# Altium PCB Intelligent_Agriculture.PcbDoc (part 5 of 5)
Units mm, origin at the board's own origin, x right, y up, seen from the top; angles counter-clockwise.
Board outline 99.69 x 99.69 mm, 2 copper layers (Top Layer, Bottom Layer); 90 components, 60 nets, 339 pads, 86 vias.
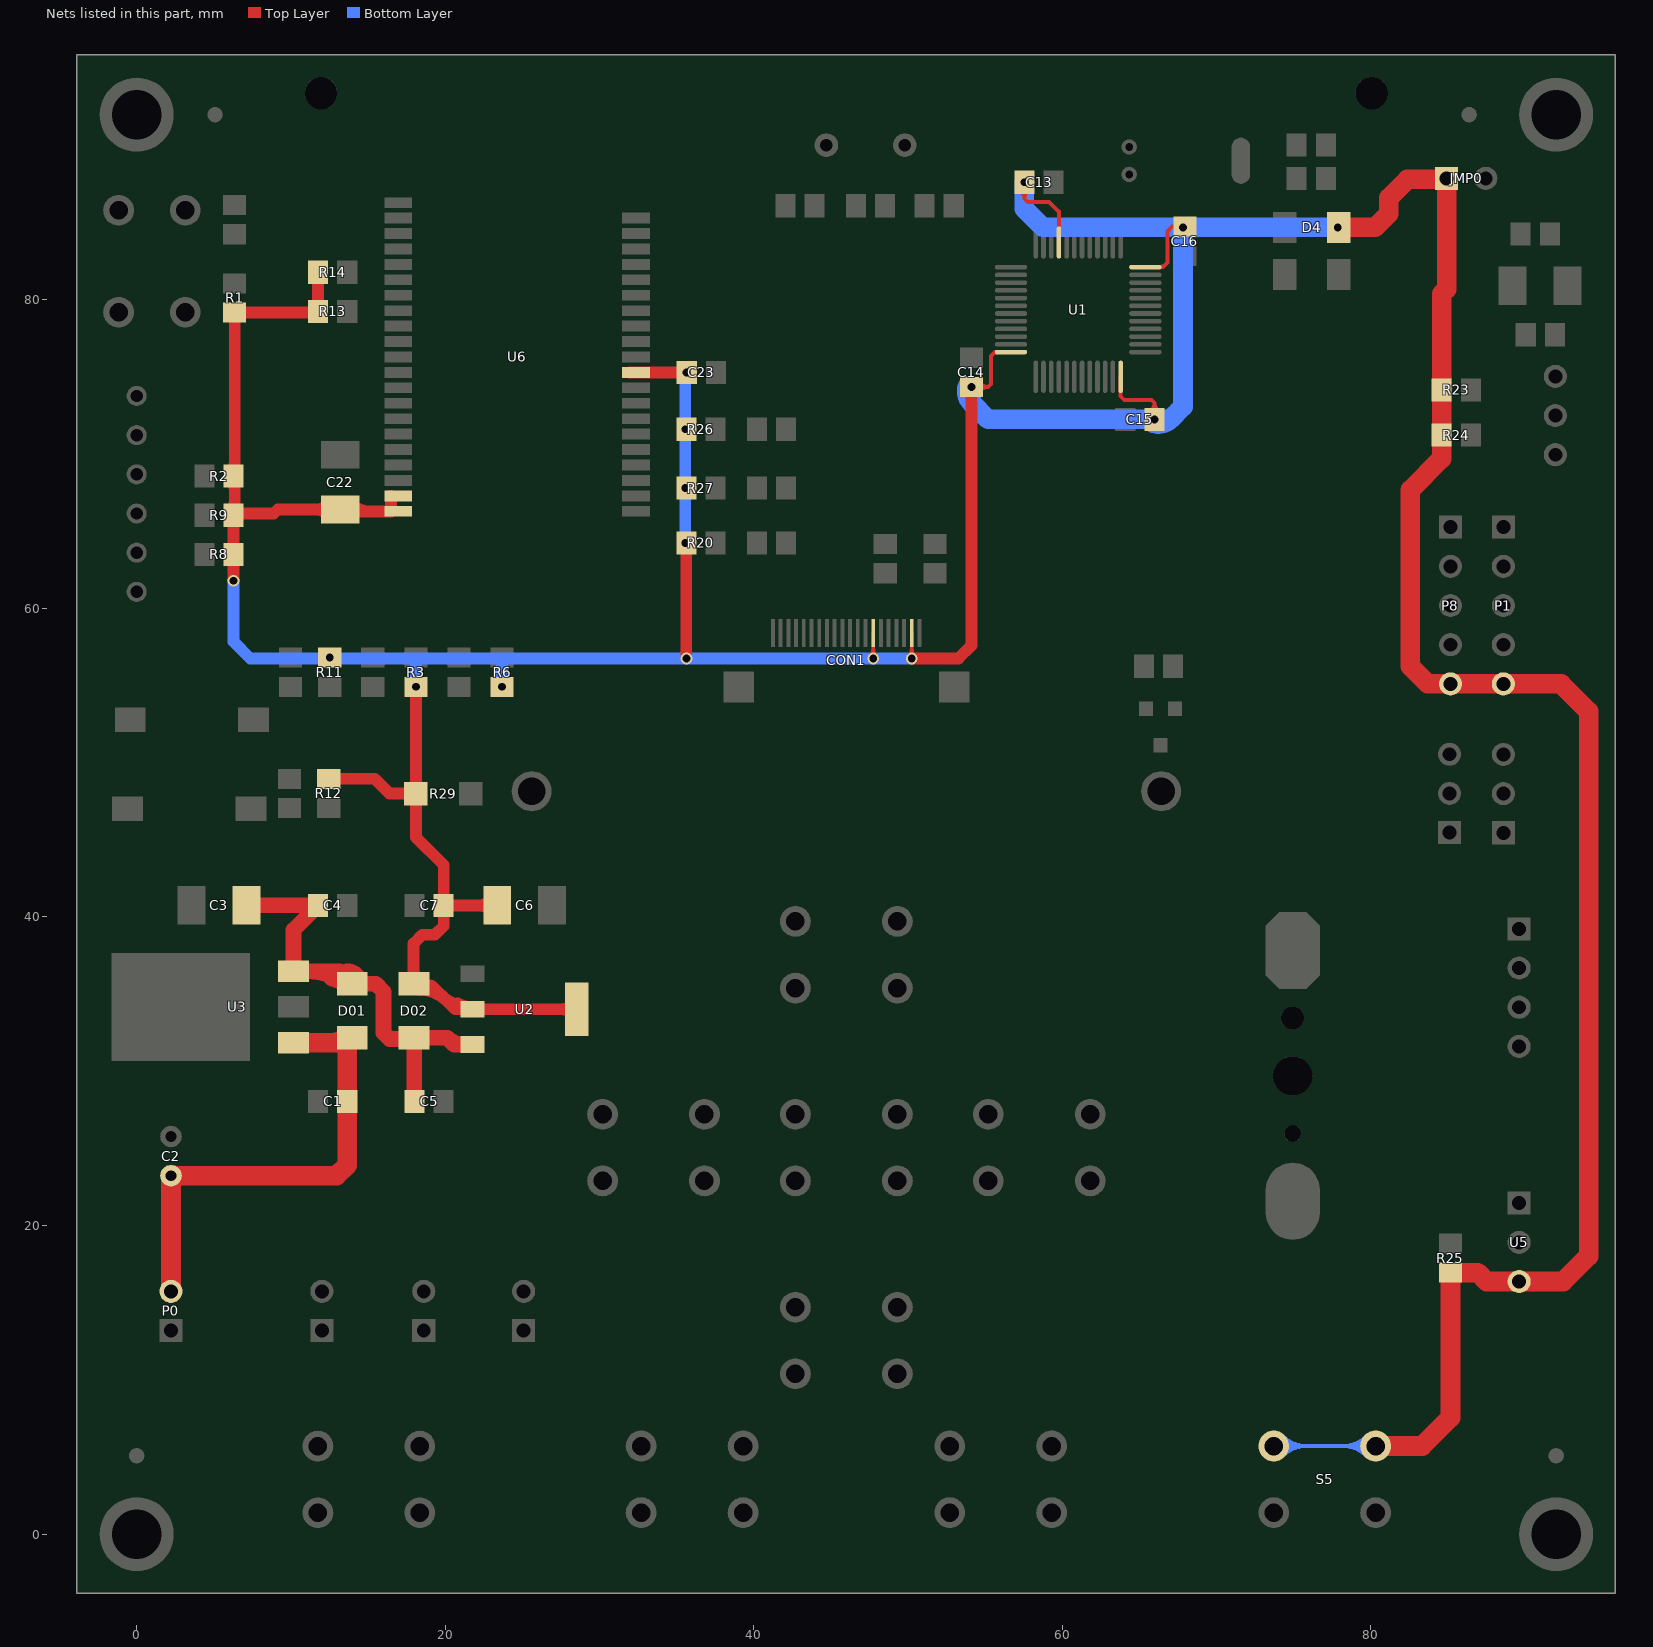
[diagram p5: the nets of this part, all layers, seen from the top]

## Via types
v1: diameter 0.762, hole 0.508, Top Layer to Bottom Layer, tented both sides, 82 vias
v2: diameter 4.8, hole 3.2, Top Layer to Bottom Layer, tented both sides, 4 vias

## Nets (pads, with @x,y where several pads share a name; then routed paths per layer and width w, separated by ;. In a path a pad name is that pad's centre, name@x,y a point inside that pad or via, vN(x,y) a via of type N, cw(c..) or ccw(c..) an arc to the next point about the centre after c; other vN are vias at no path point) (continued)
VCC3V3: C6.1 C7.1 C13.1 C14.1 C15.1 C16.1 C22.1 C23.2 CON1.14 CON1.19 D02.1 D4.1 JMP0.1 P1.5 P8.5 R1.2 R2.2 R3.2 R6.2 R8.2 R9.2 R11.1 R12.2 R13.1 R14.1 R20.2 R23.1 R24.1 R25.2 R26.2 R27.2 R29.2 S5.1 S5.4 U1.9 U1.24 U1.36 U1.48 U2.2 U2.4 U5.3 U6.10 U6.39 U6.40 | length 554.8
  Top Layer w0.254: v1(47.738,56.752) CON1.14@47.738,58.397 ; v1(50.238,56.755) CON1.19@50.238,58.397 ; 54.102,70.214 54.229,70.341 54.229,74.344 55.184,74.344 ; U1.24@56.67,76.613 55.626,76.613 55.372,76.359 55.372,74.532 55.184,74.344 ; C13.1@57.585,87.618 v1(57.534,87.618) 57.534,86.536 ; U1.9@59.774,83.717 59.774,85.713 59.754,85.713 59.119,86.348 57.722,86.348 57.534,86.536 ; U1.36@63.774,75.009 63.774,73.75 64.008,73.516 65.786,73.516 65.974,73.328 ; U1.48@65.378,82.113 66.509,82.113 66.802,82.406 66.802,84.438 67.117,84.753 ; C15.1@65.974,72.246 65.974,73.328 ; C16.1@67.945,84.753 67.117,84.753 ; JMP0.1@84.834,87.806 JMP0.1@84.9,87.872 ; 93.726,22.589 93.726,41.893 ; v1@47.559,56.932 ccw(c47.125,57.365) 47.738,57.365 ; v1@47.559,56.932 ccw(c47.125,57.365) 47.738,57.365 ; v1@47.559,56.932 ccw(c47.125,57.365) 47.738,57.365 ; 47.738,57.365 ccw(c48.352,57.365) v1@47.918,56.932 ; 47.738,57.365 ccw(c48.352,57.365) v1@47.918,56.932 ; 47.738,57.365 ccw(c48.352,57.365) v1@47.918,56.932 ; v1@50.059,56.934 ccw(c49.625,57.368) 50.238,57.368 ; v1@50.059,56.934 ccw(c49.625,57.368) 50.238,57.368 ; v1@50.059,56.934 ccw(c49.625,57.368) 50.238,57.368 ; 50.238,57.368 ccw(c50.852,57.368) v1@50.418,56.934 ; 50.238,57.368 ccw(c50.852,57.368) v1@50.418,56.934 ; 50.238,57.368 ccw(c50.852,57.368) v1@50.418,56.934 ; C14.1@53.832,73.974 cw(c52.874,73.016) 54.229,73.016 ; C14.1@53.832,73.974 cw(c52.874,73.016) 54.229,73.016 ; C14.1@53.832,73.974 cw(c52.874,73.016) 54.229,73.016 ; C14.1@53.922,74.164 cw(c53.182,73.424) 54.229,73.424 ; C14.1@53.922,74.164 cw(c53.182,73.424) 54.229,73.424 ; C14.1@53.922,74.164 cw(c53.182,73.424) 54.229,73.424 ; C14.1@54.012,74.154 cw(c53.487,73.629) 54.229,73.629 ; C14.1@54.012,74.154 cw(c53.487,73.629) 54.229,73.629 ; C14.1@54.012,74.154 cw(c53.487,73.629) 54.229,73.629 ; 54.229,73.147 cw(c55.399,73.147) C14.1@54.572,73.974 ; 54.229,73.147 cw(c55.399,73.147) C14.1@54.572,73.974 ; 54.229,73.147 cw(c55.399,73.147) C14.1@54.572,73.974 ; C14.1@54.282,74.164 cw(c54.715,73.731) C14.1@54.715,74.344 ; C14.1@54.282,74.164 cw(c54.715,73.731) C14.1@54.715,74.344 ; C14.1@54.282,74.164 cw(c54.715,73.731) C14.1@54.715,74.344 ; C14.1@54.282,74.524 ccw(c54.715,74.957) C14.1@54.715,74.344 ; C14.1@54.282,74.524 ccw(c54.715,74.957) C14.1@54.715,74.344 ; C14.1@54.282,74.524 ccw(c54.715,74.957) C14.1@54.715,74.344 ; C14.1@54.636,74.052 cw(c55.184,73.684) 55.184,74.344 ; C14.1@54.636,74.052 cw(c55.184,73.684) 55.184,74.344 ; C14.1@54.636,74.052 cw(c55.184,73.684) 55.184,74.344 ; C14.1@54.636,74.636 ccw(c55.184,75.004) 55.184,74.344 ; C14.1@54.636,74.636 ccw(c55.184,75.004) 55.184,74.344 ; C14.1@54.636,74.636 ccw(c55.184,75.004) 55.184,74.344 ; 55.485,76.472 cw(c55.77,76.187) U1.24@55.77,76.59 ; 55.485,76.472 cw(c55.77,76.187) U1.24@55.77,76.59 ; 55.485,76.472 cw(c55.77,76.187) U1.24@55.77,76.59 ; C13.1@57.242,87.084 cw(c56.874,86.536) 57.534,86.536 ; C13.1@57.242,87.084 cw(c56.874,86.536) 57.534,86.536 ; C13.1@57.242,87.084 cw(c56.874,86.536) 57.534,86.536 ; C13.1@57.354,87.438 cw(c56.921,87.005) C13.1@57.534,87.005 ; C13.1@57.354,87.438 cw(c56.921,87.005) C13.1@57.534,87.005 ; C13.1@57.354,87.438 cw(c56.921,87.005) C13.1@57.534,87.005 ; 57.534,86.536 cw(c58.194,86.536) C13.1@57.826,87.084 ; 57.534,86.536 cw(c58.194,86.536) C13.1@57.826,87.084 ; 57.534,86.536 cw(c58.194,86.536) C13.1@57.826,87.084 ; C13.1@57.534,87.005 cw(c58.147,87.005) C13.1@57.714,87.438 ; C13.1@57.534,87.005 cw(c58.147,87.005) C13.1@57.714,87.438 ; C13.1@57.534,87.005 cw(c58.147,87.005) C13.1@57.714,87.438 ; C15.1@65.682,72.78 ccw(c65.314,73.328) 65.974,73.328 ; C15.1@65.682,72.78 ccw(c65.314,73.328) 65.974,73.328 ; C15.1@65.682,72.78 ccw(c65.314,73.328) 65.974,73.328 ; C15.1@65.797,72.431 ccw(c65.371,72.857) C15.1@65.974,72.857 ; C15.1@65.797,72.431 ccw(c65.371,72.857) C15.1@65.974,72.857 ; C15.1@65.797,72.431 ccw(c65.371,72.857) C15.1@65.974,72.857 ; C15.1@65.974,72.871 ccw(c66.597,72.871) C15.1@66.157,72.431 ; C15.1@65.974,72.871 ccw(c66.597,72.871) C15.1@66.157,72.431 ; C15.1@65.974,72.871 ccw(c66.597,72.871) C15.1@66.157,72.431 ; 65.974,73.328 ccw(c66.634,73.328) C15.1@66.266,72.78 ; 65.974,73.328 ccw(c66.634,73.328) C15.1@66.266,72.78 ; 65.974,73.328 ccw(c66.634,73.328) C15.1@66.266,72.78 ; U1.48@66.278,82.136 ccw(c66.278,82.749) 66.712,82.316 ; U1.48@66.278,82.136 ccw(c66.278,82.749) 66.712,82.316 ; U1.48@66.278,82.136 ccw(c66.278,82.749) 66.712,82.316 ; 67.117,84.753 ccw(c67.117,84.998) C16.1@67.349,84.92 ; 67.117,84.753 cw(c67.117,84.508) C16.1@67.349,84.586 ; 67.117,84.753 cw(c67.117,84.07) C16.1@67.628,84.523 ; 67.117,84.753 ccw(c67.117,84.998) C16.1@67.349,84.92 ; 67.117,84.753 cw(c67.117,84.508) C16.1@67.349,84.586 ; 67.117,84.753 cw(c67.117,84.07) C16.1@67.628,84.523 ; 67.117,84.753 ccw(c67.117,84.998) C16.1@67.349,84.92 ; 67.117,84.753 cw(c67.117,84.508) C16.1@67.349,84.586 ; 67.117,84.753 cw(c67.117,84.07) C16.1@67.628,84.523 ; C16.1@67.352,84.753 ccw(c67.352,85.158) C16.1@67.638,84.872 ; C16.1@67.352,84.753 ccw(c67.352,85.158) C16.1@67.638,84.872 ; C16.1@67.352,84.753 ccw(c67.352,85.158) C16.1@67.638,84.872
  Top Layer w0.762: v1(6.284,61.788) R9.2@6.284,66.15 ; 11.047,79.17 cw(c11.047,78.445) R13.1@11.56,78.958 ; R13.1@11.672,79.17 R1.2@6.35,79.17 6.35,66.15 8.89,66.15 9.144,66.404 12.954,66.404 13.076,66.282 U6.40@16.477,66.282 ; R13.1@11.75,79.248 R14.1@11.75,81.788 ; R12.2@12.446,48.956 15.428,48.956 16.39,47.994 R29.2@18.098,47.994 ; U6.40@16.477,66.277 U6.40@16.477,66.282 ; U6.39@16.477,67.277 U6.40@16.477,66.282 ; v1(18.098,54.918) R29.2@18.098,47.994 ; D02.1@18.347,35.319 cw(c18.643,34.401) 19.324,35.083 ; C6.1@23.368,40.75 C7.1@19.898,40.75 ; U2.4@28.521,34.019 U2.2@21.771,34.019 20.65,34.019 19.126,35.543 ; U6.10@31.941,75.282 32.322,75.282 34.532,75.282 34.544,75.294 v1(35.626,75.294) ; v1@35.626,56.777 R20.2@35.626,64.245 R20.2@35.626,64.397 ; v1(50.238,56.755) 53.267,56.755 54.102,57.59 54.102,70.214 v1(54.102,74.344) ; R9.2@6.094,66.33 ccw(c5.475,66.949) 6.35,66.949 ; R9.2@6.094,66.33 ccw(c5.475,66.949) 6.35,66.949 ; R9.2@6.094,66.33 ccw(c5.475,66.949) 6.35,66.949 ; R2.2@6.094,68.29 cw(c5.475,67.671) 6.35,67.671 ; R2.2@6.094,68.29 cw(c5.475,67.671) 6.35,67.671 ; R2.2@6.094,68.29 cw(c5.475,67.671) 6.35,67.671 ; R2.2@6.094,68.87 ccw(c5.475,69.489) 6.35,69.489 ; R2.2@6.094,68.87 ccw(c5.475,69.489) 6.35,69.489 ; R2.2@6.094,68.87 ccw(c5.475,69.489) 6.35,69.489 ; R9.2@6.474,65.95 cw(c6.958,65.466) 6.958,66.15 ; R9.2@6.474,65.95 cw(c6.958,65.466) 6.958,66.15 ; R9.2@6.474,65.95 cw(c6.958,65.466) 6.958,66.15 ; 11.605,66.404 ccw(c11.605,67.657) C22.1@12.491,66.771 ; 11.605,66.404 cw(c11.605,65.151) C22.1@12.491,66.037 ; 11.605,66.404 ccw(c11.605,67.657) C22.1@12.491,66.771 ; 11.605,66.404 cw(c11.605,65.151) C22.1@12.491,66.037 ; 11.605,66.404 ccw(c11.605,67.657) C22.1@12.491,66.771 ; 11.605,66.404 cw(c11.605,65.151) C22.1@12.491,66.037 ; C22.1@13.925,66.037 cw(c14.516,65.446) 14.516,66.282 ; C22.1@13.925,66.037 cw(c14.516,65.446) 14.516,66.282 ; C22.1@13.925,66.037 cw(c14.516,65.446) 14.516,66.282 ; C22.1@13.925,66.771 ccw(c15.106,67.952) 15.106,66.282 ; C22.1@13.925,66.771 ccw(c15.106,67.952) 15.106,66.282 ; C22.1@13.925,66.771 ccw(c15.106,67.952) 15.106,66.282 ; 17.178,47.994 ccw(c17.178,48.914) R29.2@17.829,48.263 ; 17.178,47.994 cw(c17.178,47.074) R29.2@17.829,47.725 ; 17.178,47.994 ccw(c17.178,48.914) R29.2@17.829,48.263 ; 17.178,47.994 cw(c17.178,47.074) R29.2@17.829,47.725 ; 17.178,47.994 ccw(c17.178,48.914) R29.2@17.829,48.263 ; 17.178,47.994 cw(c17.178,47.074) R29.2@17.829,47.725 ; D02.1@17.722,35.931 ccw(c17.174,36.479) 17.949,36.479 ; D02.1@17.722,35.931 ccw(c17.174,36.479) 17.949,36.479 ; D02.1@17.722,35.931 ccw(c17.174,36.479) 17.949,36.479 ; R29.2@17.829,47.725 cw(c17.178,47.074) 18.098,47.074 ; R29.2@17.829,47.725 cw(c17.178,47.074) 18.098,47.074 ; R29.2@17.829,47.725 cw(c17.178,47.074) 18.098,47.074 ; R29.2@17.829,48.263 ccw(c17.178,48.914) 18.098,48.914 ; R29.2@17.829,48.263 ccw(c17.178,48.914) 18.098,48.914 ; R29.2@17.829,48.263 ccw(c17.178,48.914) 18.098,48.914 ; 17.949,36.643 ccw(c18.956,36.643) D02.1@18.244,35.931 ; 17.949,36.643 ccw(c18.956,36.643) D02.1@18.244,35.931 ; 17.949,36.643 ccw(c18.956,36.643) D02.1@18.244,35.931 ; 18.098,47.074 cw(c19.018,47.074) R29.2@18.367,47.725 ; 18.098,47.074 cw(c19.018,47.074) R29.2@18.367,47.725 ; 18.098,47.074 cw(c19.018,47.074) R29.2@18.367,47.725 ; R29.2@18.098,47.994 18.098,45.167 19.898,43.367 C7.1@19.898,40.75 ; 18.098,48.914 ccw(c19.018,48.914) R29.2@18.367,48.263 ; 18.098,48.914 ccw(c19.018,48.914) R29.2@18.367,48.263 ; 18.098,48.914 ccw(c19.018,48.914) R29.2@18.367,48.263 ; D02.1@18.233,35.301 cw(c18.233,32.561) 20.171,34.498 ; D02.1@18.233,35.301 cw(c18.233,32.561) 20.171,34.498 ; D02.1@18.233,35.301 cw(c18.233,32.561) 20.171,34.498 ; D02.1@18.546,35.865 ccw(c19.126,36.226) 19.126,35.543 ; D02.1@18.546,35.865 ccw(c19.126,36.226) 19.126,35.543 ; D02.1@18.546,35.865 ccw(c19.126,36.226) 19.126,35.543 ; D02.1@18.553,35.855 ccw(c20.378,36.908) 19.833,34.872 ; D02.1@18.553,35.855 ccw(c20.378,36.908) 19.833,34.872 ; D02.1@18.553,35.855 ccw(c20.378,36.908) 19.833,34.872 ; 19.126,35.543 17.949,35.543 17.949,38.28 18.517,38.848 19.331,38.848 19.898,39.414 C7.1@19.898,40.75 ; 19.728,34.941 ccw(c21.546,36.759) U2.2@21.546,34.188 ; 19.728,34.941 ccw(c21.546,36.759) U2.2@21.546,34.188 ; 19.728,34.941 ccw(c21.546,36.759) U2.2@21.546,34.188 ; 20.813,34.384 cw(c20.564,33.452) U2.2@21.4,33.935 ; 20.813,34.384 cw(c20.564,33.452) U2.2@21.4,33.935 ; 20.813,34.384 cw(c20.564,33.452) U2.2@21.4,33.935 ; 22.115,40.75 ccw(c22.115,42.003) C6.1@23.001,41.117 ; 22.115,40.75 cw(c22.115,39.497) C6.1@23.001,40.383 ; 22.115,40.75 ccw(c22.115,42.003) C6.1@23.001,41.117 ; 22.115,40.75 cw(c22.115,39.497) C6.1@23.001,40.383 ; 22.115,40.75 ccw(c22.115,42.003) C6.1@23.001,41.117 ; 22.115,40.75 cw(c22.115,39.497) C6.1@23.001,40.383 ; 27.57,34.019 ccw(c27.57,34.97) U2.4@28.242,34.298 ; 27.57,34.019 cw(c27.57,33.068) U2.4@28.242,33.74 ; 27.57,34.019 ccw(c27.57,34.97) U2.4@28.242,34.298 ; 27.57,34.019 cw(c27.57,33.068) U2.4@28.242,33.74 ; 27.57,34.019 ccw(c27.57,34.97) U2.4@28.242,34.298 ; 27.57,34.019 cw(c27.57,33.068) U2.4@28.242,33.74
  Top Layer w1.27: D4.1@77.915,84.697 80.269,84.697 81.153,85.581 81.153,86.597 82.362,87.806 JMP0.1@84.834,87.806 ; S5.1@80.302,5.71 83.312,5.71 85.154,7.552 R25.2@85.154,16.945 86.924,16.945 87.498,16.371 U5.3@89.599,16.371 92.461,16.371 94.107,18.017 94.107,53.323 92.324,55.106 P1.5@88.583,55.106 83.688,55.106 82.55,56.244 82.55,67.674 84.585,69.709 R24.1@84.585,71.235 R23.1@84.585,74.156 84.585,80.377 84.9,80.692 JMP0.1@84.9,87.872
  Bottom Layer w0.254: S5.4@73.698,5.71 S5.1@80.302,5.71 ; S5.4@74.136,5.272 cw(c75.192,4.216) 75.192,5.71 ; S5.4@74.136,5.272 cw(c75.192,4.216) 75.192,5.71 ; S5.4@74.136,5.272 cw(c75.192,4.216) 75.192,5.71 ; S5.4@74.136,6.148 ccw(c75.192,7.204) 75.192,5.71 ; S5.4@74.136,6.148 ccw(c75.192,7.204) 75.192,5.71 ; S5.4@74.136,6.148 ccw(c75.192,7.204) 75.192,5.71 ; S5.4@74.315,5.093 cw(c75.806,3.602) 75.806,5.71 ; S5.4@74.315,5.093 cw(c75.806,3.602) 75.806,5.71 ; S5.4@74.315,5.093 cw(c75.806,3.602) 75.806,5.71 ; S5.4@74.315,6.327 ccw(c75.806,7.818) 75.806,5.71 ; S5.4@74.315,6.327 ccw(c75.806,7.818) 75.806,5.71 ; S5.4@74.315,6.327 ccw(c75.806,7.818) 75.806,5.71 ; 78.194,5.71 ccw(c78.194,7.818) S5.1@79.685,6.327 ; 78.194,5.71 cw(c78.194,3.602) S5.1@79.685,5.093 ; 78.194,5.71 ccw(c78.194,7.818) S5.1@79.685,6.327 ; 78.194,5.71 cw(c78.194,3.602) S5.1@79.685,5.093 ; 78.194,5.71 ccw(c78.194,7.818) S5.1@79.685,6.327 ; 78.194,5.71 cw(c78.194,3.602) S5.1@79.685,5.093 ; 78.808,5.71 ccw(c78.808,7.204) S5.1@79.864,6.148 ; 78.808,5.71 cw(c78.808,4.216) S5.1@79.864,5.272 ; 78.808,5.71 ccw(c78.808,7.204) S5.1@79.864,6.148 ; 78.808,5.71 cw(c78.808,4.216) S5.1@79.864,5.272 ; 78.808,5.71 ccw(c78.808,7.204) S5.1@79.864,6.148 ; 78.808,5.71 cw(c78.808,4.216) S5.1@79.864,5.272
  Bottom Layer w0.762: v1(6.284,61.788) 6.284,57.834 7.366,56.752 18.098,56.752 ; v1(18.098,54.918) 18.098,56.752 ; v1(23.686,54.918) 23.686,56.752 ; v1(35.56,64.245) v1(35.56,67.801) v1(35.56,71.611) v1@35.56,75.294 ; v1@50.216,56.752 v1(47.738,56.752) v1(35.636,56.752) 23.686,56.752 ; 18.098,56.752 23.686,56.752
  Bottom Layer w1.27: v1(54.102,74.344) 54.102,73.331 ; v1(57.534,87.618) 57.534,85.901 58.743,84.692 v1(67.818,84.692) ; v1(77.851,84.692) v1(67.818,84.692) ; v1@53.848,74.344 ccw(c55.68,74.344) 54.385,73.048 ; v1@53.848,74.344 ccw(c55.68,74.344) 54.385,73.048 ; v1@53.848,74.344 ccw(c55.68,74.344) 54.385,73.048 ; v1@53.864,74.434 ccw(c54.837,74.066) 54.102,73.331 ; v1@53.864,74.434 ccw(c54.837,74.066) 54.102,73.331 ; v1@53.864,74.434 ccw(c54.837,74.066) 54.102,73.331 ; 54.102,73.331 55.182,72.251 v1(65.977,72.251) 66.993,72.251 ; v1@65.887,72.014 ccw(c66.256,72.988) 66.993,72.251 ; v1@65.887,72.014 ccw(c66.256,72.988) 66.993,72.251 ; v1@65.887,72.014 ccw(c66.256,72.988) 66.993,72.251 ; v1@65.977,71.997 ccw(c65.977,73.837) 67.278,72.536 ; v1@65.977,71.997 ccw(c65.977,73.837) 67.278,72.536 ; v1@65.977,71.997 ccw(c65.977,73.837) 67.278,72.536 ; 66.993,72.251 67.818,73.076 v1(67.818,84.692)
  other v1: 12.51,56.818
VCC5V: C3.1 C4.1 C5.1 D01.1 D02.2 U2.3 U3.3 | length 56.8
  Top Layer w1.016: C3.1@6.985,40.877 C3.1@7.112,40.75 C4.1@11.75,40.75 10.16,39.16 U3.3@10.16,36.483 13.157,36.483 ; 12.942,35.904 cw(c12.942,35.272) D01.1@13.505,35.56 ; C5.1@17.983,28.065 D02.2@17.983,32.17 ; U2.3@21.771,31.719 20.588,31.719 20.137,32.17 ; C3.1@7.389,40.473 cw(c8.058,39.804) 8.058,40.75 ; C3.1@7.389,40.473 cw(c8.058,39.804) 8.058,40.75 ; C3.1@7.389,40.473 cw(c8.058,39.804) 8.058,40.75 ; C3.1@7.389,41.027 ccw(c8.058,41.696) 8.058,40.75 ; C3.1@7.389,41.027 ccw(c8.058,41.696) 8.058,40.75 ; C3.1@7.389,41.027 ccw(c8.058,41.696) 8.058,40.75 ; 11.173,36.483 cw(c11.173,33.123) D01.1@13.549,35.499 ; 11.173,36.483 cw(c11.173,33.123) D01.1@13.549,35.499 ; 11.173,36.483 cw(c11.173,33.123) D01.1@13.549,35.499 ; 12.608,36.042 ccw(c13.3,37.239) D01.1@13.657,35.904 ; 12.608,36.042 ccw(c13.3,37.239) D01.1@13.657,35.904 ; 12.608,36.042 ccw(c13.3,37.239) D01.1@13.657,35.904 ; 13.157,36.483 cw(c12.382,35.707) D01.1@13.478,35.677 ; 13.157,36.483 cw(c12.382,35.707) D01.1@13.478,35.677 ; 13.157,36.483 cw(c12.382,35.707) D01.1@13.478,35.677 ; 13.157,36.483 D01.1@13.97,35.67 15.494,35.67 16.002,35.162 16.002,32.495 16.408,32.089 17.902,32.089 D02.2@17.983,32.17 ; 13.626,36.483 cw(c13.626,35.576) D01.1@14.267,36.217 ; 13.626,36.483 cw(c13.626,35.576) D01.1@14.267,36.217 ; 13.626,36.483 cw(c13.626,35.576) D01.1@14.267,36.217 ; 16.952,32.089 ccw(c16.952,32.951) D02.2@17.562,32.341 ; 16.952,32.089 ccw(c16.952,32.951) D02.2@17.562,32.341 ; 16.952,32.089 ccw(c16.952,32.951) D02.2@17.562,32.341 ; D02.2@17.983,32.17 20.137,32.17 ; 20.137,32.17 ccw(c21.212,33.245) U2.3@21.537,31.76 ; 20.137,32.17 ccw(c21.212,33.245) U2.3@21.537,31.76 ; 20.137,32.17 ccw(c21.212,33.245) U2.3@21.537,31.76
VCC12V: C1.1 C2.1 D01.2 P0.2 U3.1 | length 34.2
  Top Layer w1.27: P0.2@2.223,15.736 C2.1@2.223,23.229 12.959,23.229 13.65,23.92 C1.1@13.65,28.05 D01.2@13.65,31.85 ; U3.1@10.16,31.86 13.64,31.86 D01.2@13.65,31.85 ; D01.2@13.97,32.17 D01.2@13.65,31.85 ; 12.694,31.86 ccw(c12.694,33.196) D01.2@13.639,32.251 ; 12.694,31.86 ccw(c12.694,33.196) D01.2@13.639,32.251 ; 12.694,31.86 ccw(c12.694,33.196) D01.2@13.639,32.251
pads on no net: BT1.0 CON1.4 CON1.5 CON1.6 CON1.7 CON1.8 CON1.9 CON1.10 CON1.11 CON1.A CON1.B P6.3 P6.4 U1.2 U1.38 U6.1 U6.2 U6.3 U6.4 U6.5 U6.6 U6.7 U6.11 U6.14 U6.15 U6.16 U6.17 U6.18 U6.19 U6.22 U6.23 U6.24 U6.27 U6.28 U6.32 U6.34 U6.35 U6.38 U6.41 Y1.3
copper on no net:
  other v2: 0,0 92,0 0,92 92,92

## Polygon pours and split planes (outlines as drawn)
GND on Bottom Layer "Keep-Out Layer-No Net" (solid, remove dead copper, pour order 29): -3.873,95.873 95.822,95.873 95.822,-3.822 -3.873,-3.822
GND on Top Layer "Keep-Out Layer-No Net" (solid, remove dead copper, pour order 4): -3.927,95.738 95.768,95.738 95.768,-3.957 -3.927,-3.957

## Keep-outs
Keep-Out Layer:
  lines w0.254: -3.873,-3.822 -3.873,95.873 95.822,95.873 95.822,-3.822 -3.873,-3.822 ; 39.688,42.152 39.688,50.28 52.515,50.28 52.515,42.152 39.688,42.152

## Silkscreen, mask and mechanical layers (free items; w line width, h text height)
Top Overlay:
  lines w0.254: 7.176,7.989 28.131,7.989 28.131,24.118 7.176,24.118 7.176,7.989
  text "1" at 82.296,87.428 h1.02
  text "BOOT0" at 89.408,87.428 h1.02
  text "GND" at 80.836,64.758 h1.02
  text "GND" at 90.488,64.758 h1.02
  text "NRST" at 79.756,62.23 h1.02
  text "NRST" at 90.488,62.218 h1.02
  text "SWCLK" at 78.677,59.805 h1.02
  text "SWCLK" at 90.107,59.551 h1.02
  text "SWDIO" at 78.677,57.138 h1.02
  text "SWDIO" at 90.107,57.138 h1.02
  text "3V3" at 80.582,54.725 h1.02
  text "3V3" at 90.488,54.471 h1.02
  text "TX" at 81.598,50.026 h1.02
  text "RX" at 90.488,50.026 h1.02
  text "RX" at 81.598,47.486 h1.02
  text "TX" at 90.488,47.486 h1.02
  text "GND" at 80.582,44.946 h1.02
  text "GND" at 90.488,44.946 h1.02
  text "1" at 94.298,38.85 h1.02
  text "2" at 94.044,36.183 h1.02
  text "3" at 94.044,33.643 h1.02
  text "继电器" at 86.17,32.627 h2.03 r90
  text "4" at 94.044,31.23 h1.02
  text "土壤湿度传感器" at 11.621,21.832 h2.03
  text "GND" at 94.679,20.435 h1.02 r90
  text "12V" at 1.334,18.784 h1.02
  text "PA0" at 10.986,18.784 h1.02
  text "PA1" at 17.971,18.784 h1.02
  text "PA2" at 24.194,18.784 h1.02
  text "T" at 94.679,18.784 h1.02 r90
  text "3V3" at 94.679,14.847 h1.02 r90
  text "Intelligent Agriculture V1.3" at 63.945,14.466 h1.52
  text "2015.12" at 75.248,11.926 h1.52
  text "GND" at 10.732,9.386 h1.02
  text "GND" at 17.336,9.386 h1.02
  text "GND" at 23.813,9.386 h1.02
  text "GND" at 1.334,9.132 h1.02
Bottom Overlay:
  text "UP" at 47.054,32.5 h1.27
  text "RIGTH" at 36.386,19.927 h1.27
  text "OK" at 47.181,19.927 h1.27
  text "LEFT" at 60.77,19.927 h1.27
  text "DOWN" at 48.451,7.481 h1.27
  text "SMART" at 17.971,-1.917 h1.27
  text "RETURN" at 39.815,-1.917 h1.27
  text "SET" at 57.722,-1.917 h1.27
  text "ON-OFF" at 81.09,-1.917 h1.27

## Text inside footprints (layer, text, board x,y; h text height)
P6: Bottom Overlay "JLX12864G-1504-BN" at 31.433,44.565 h1.02; Bottom Overlay "K" at 63.743,48.137 h1.02; Bottom Overlay "A" at 28.818,48.264 h1.02